# Altium PCB PCI_HIT_carrier.PcbDoc (part 1 of 2)
Units mm, origin at the board's own origin, x right, y up, seen from the top; angles counter-clockwise.
Board outline 51.3 x 50.35 mm, 4 copper layers (Top Layer, HV_vss, vdd_gnd, Bottom Layer); 9 components, 93 nets, 190 pads, 124 vias.
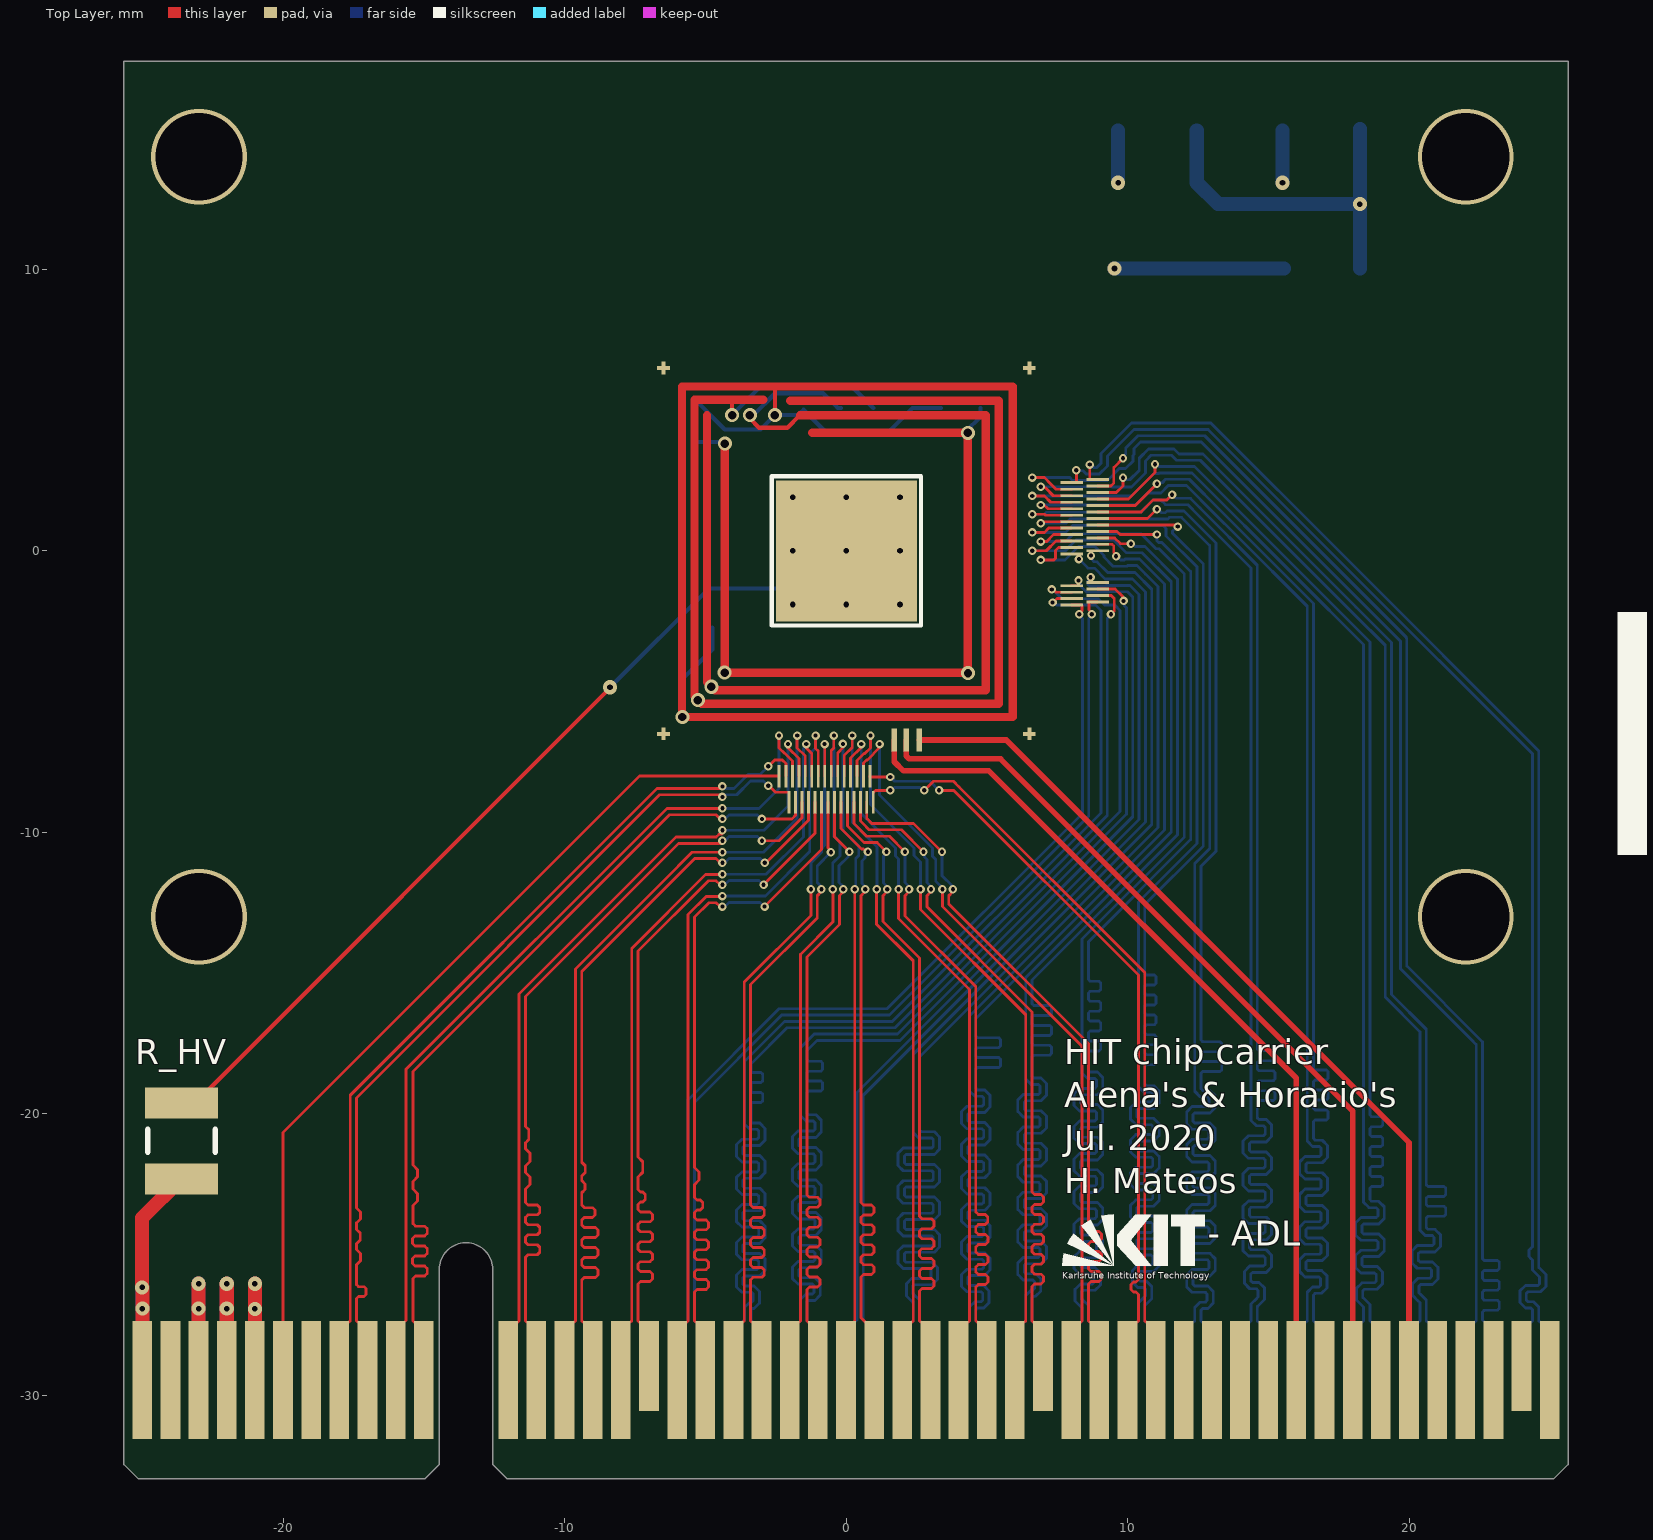
[diagram p0: Top Layer view]
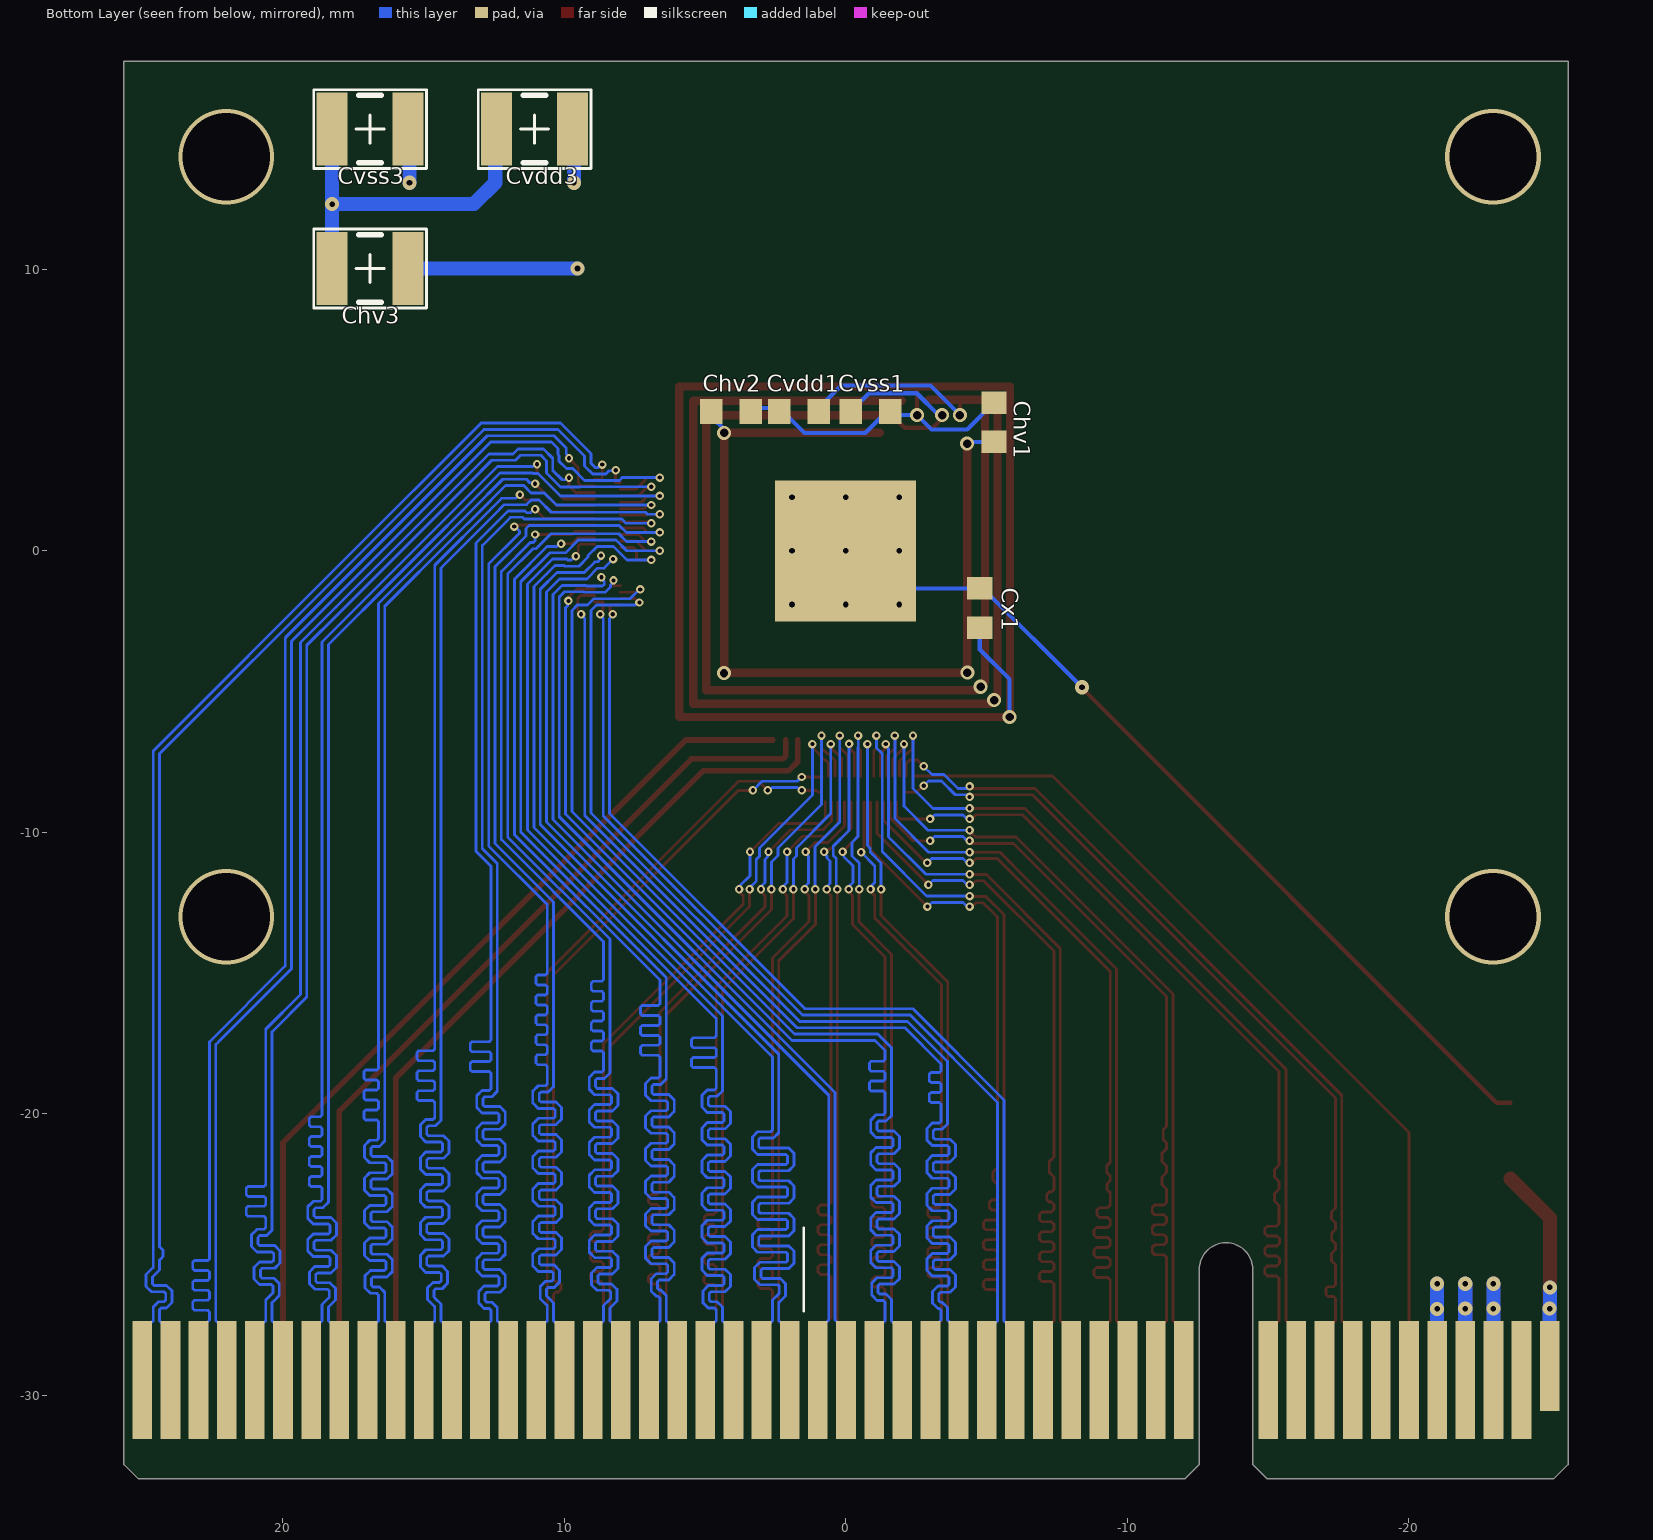
[diagram p1: Bottom Layer view, seen from below]
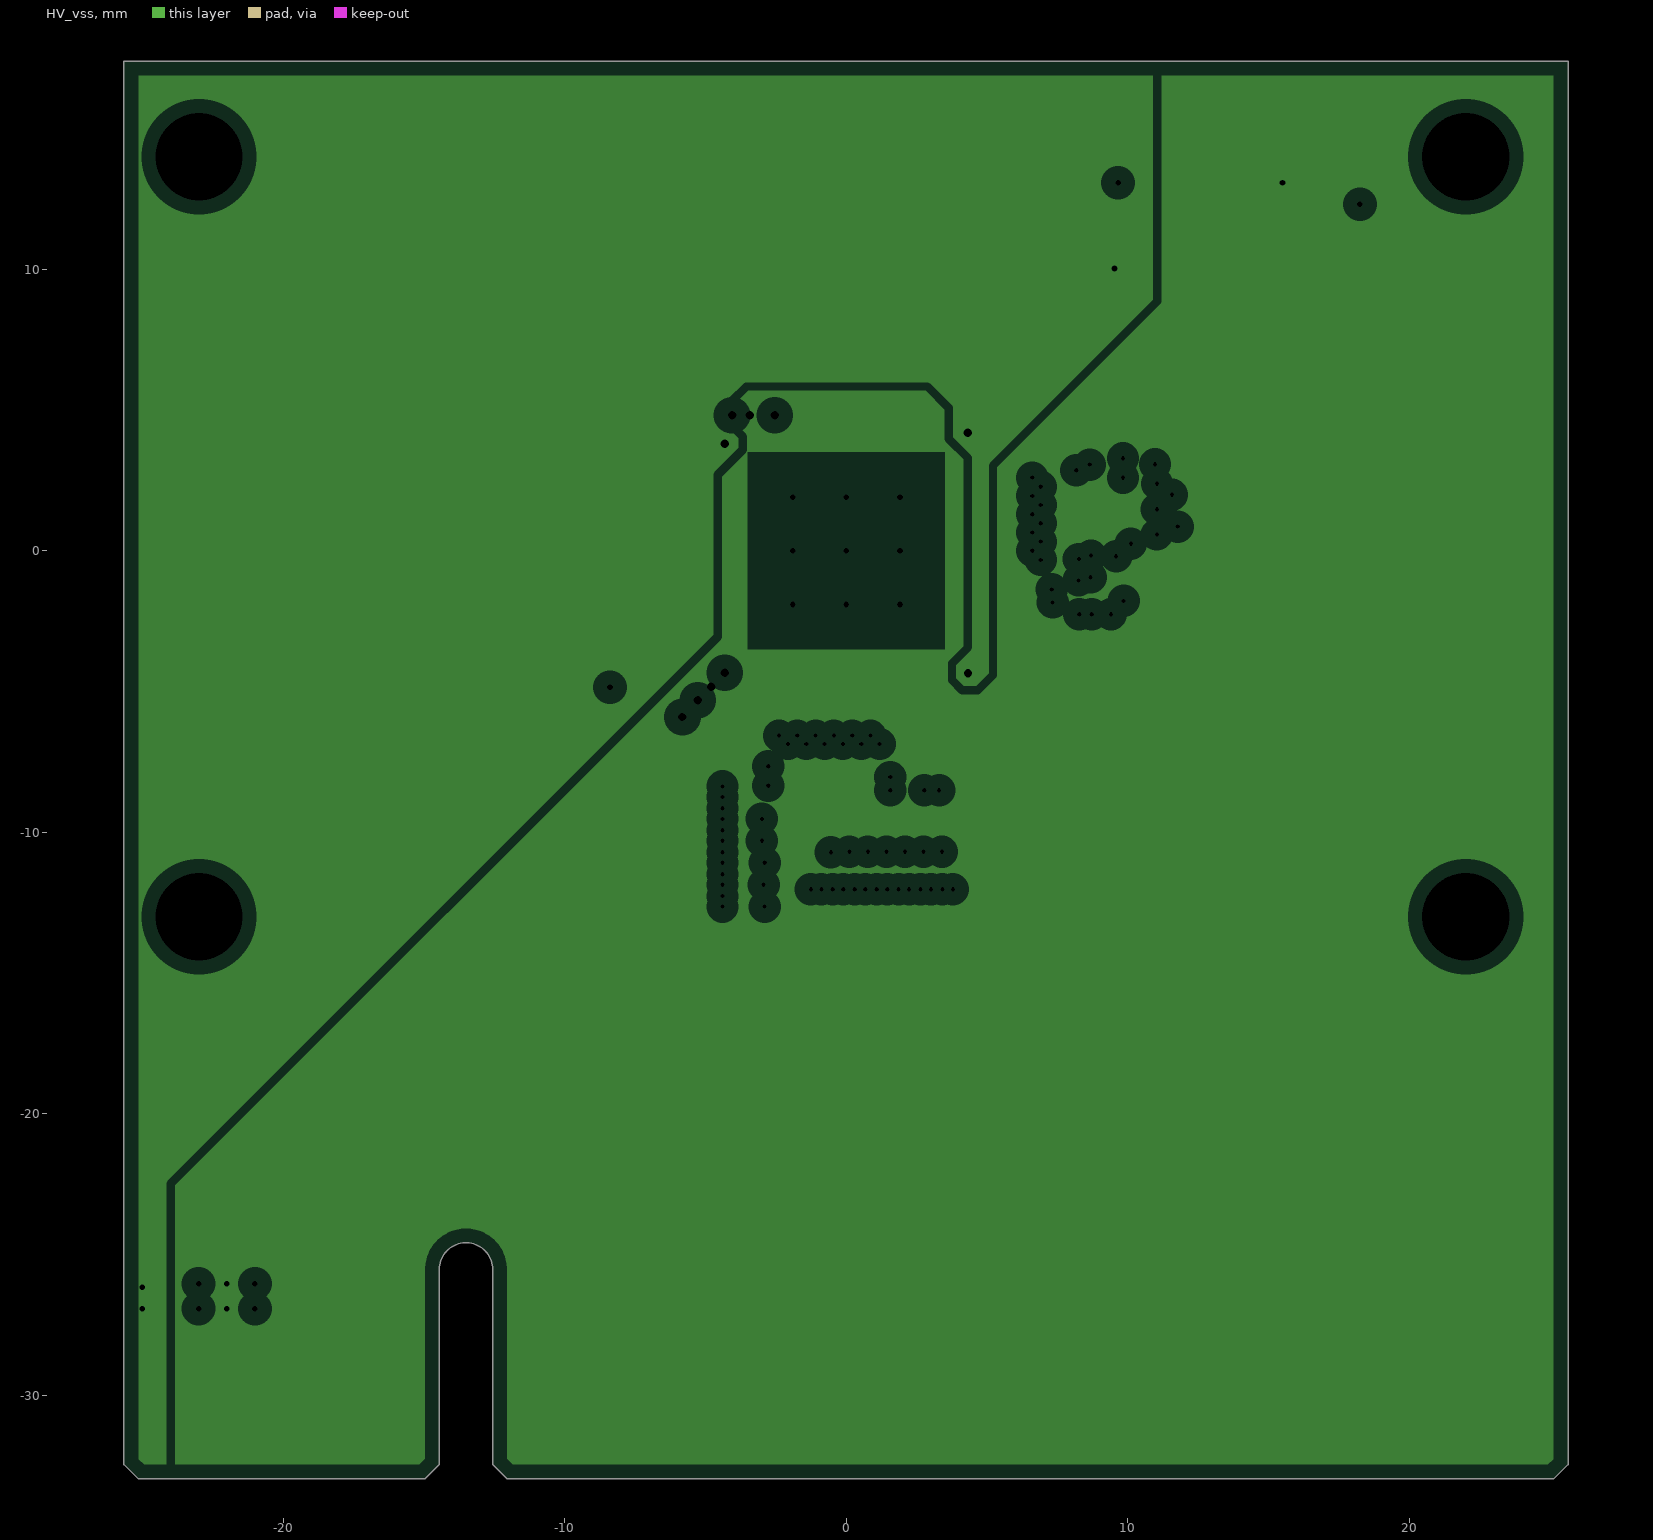
[diagram p2: HV_vss, clearances drawn from the general rule]
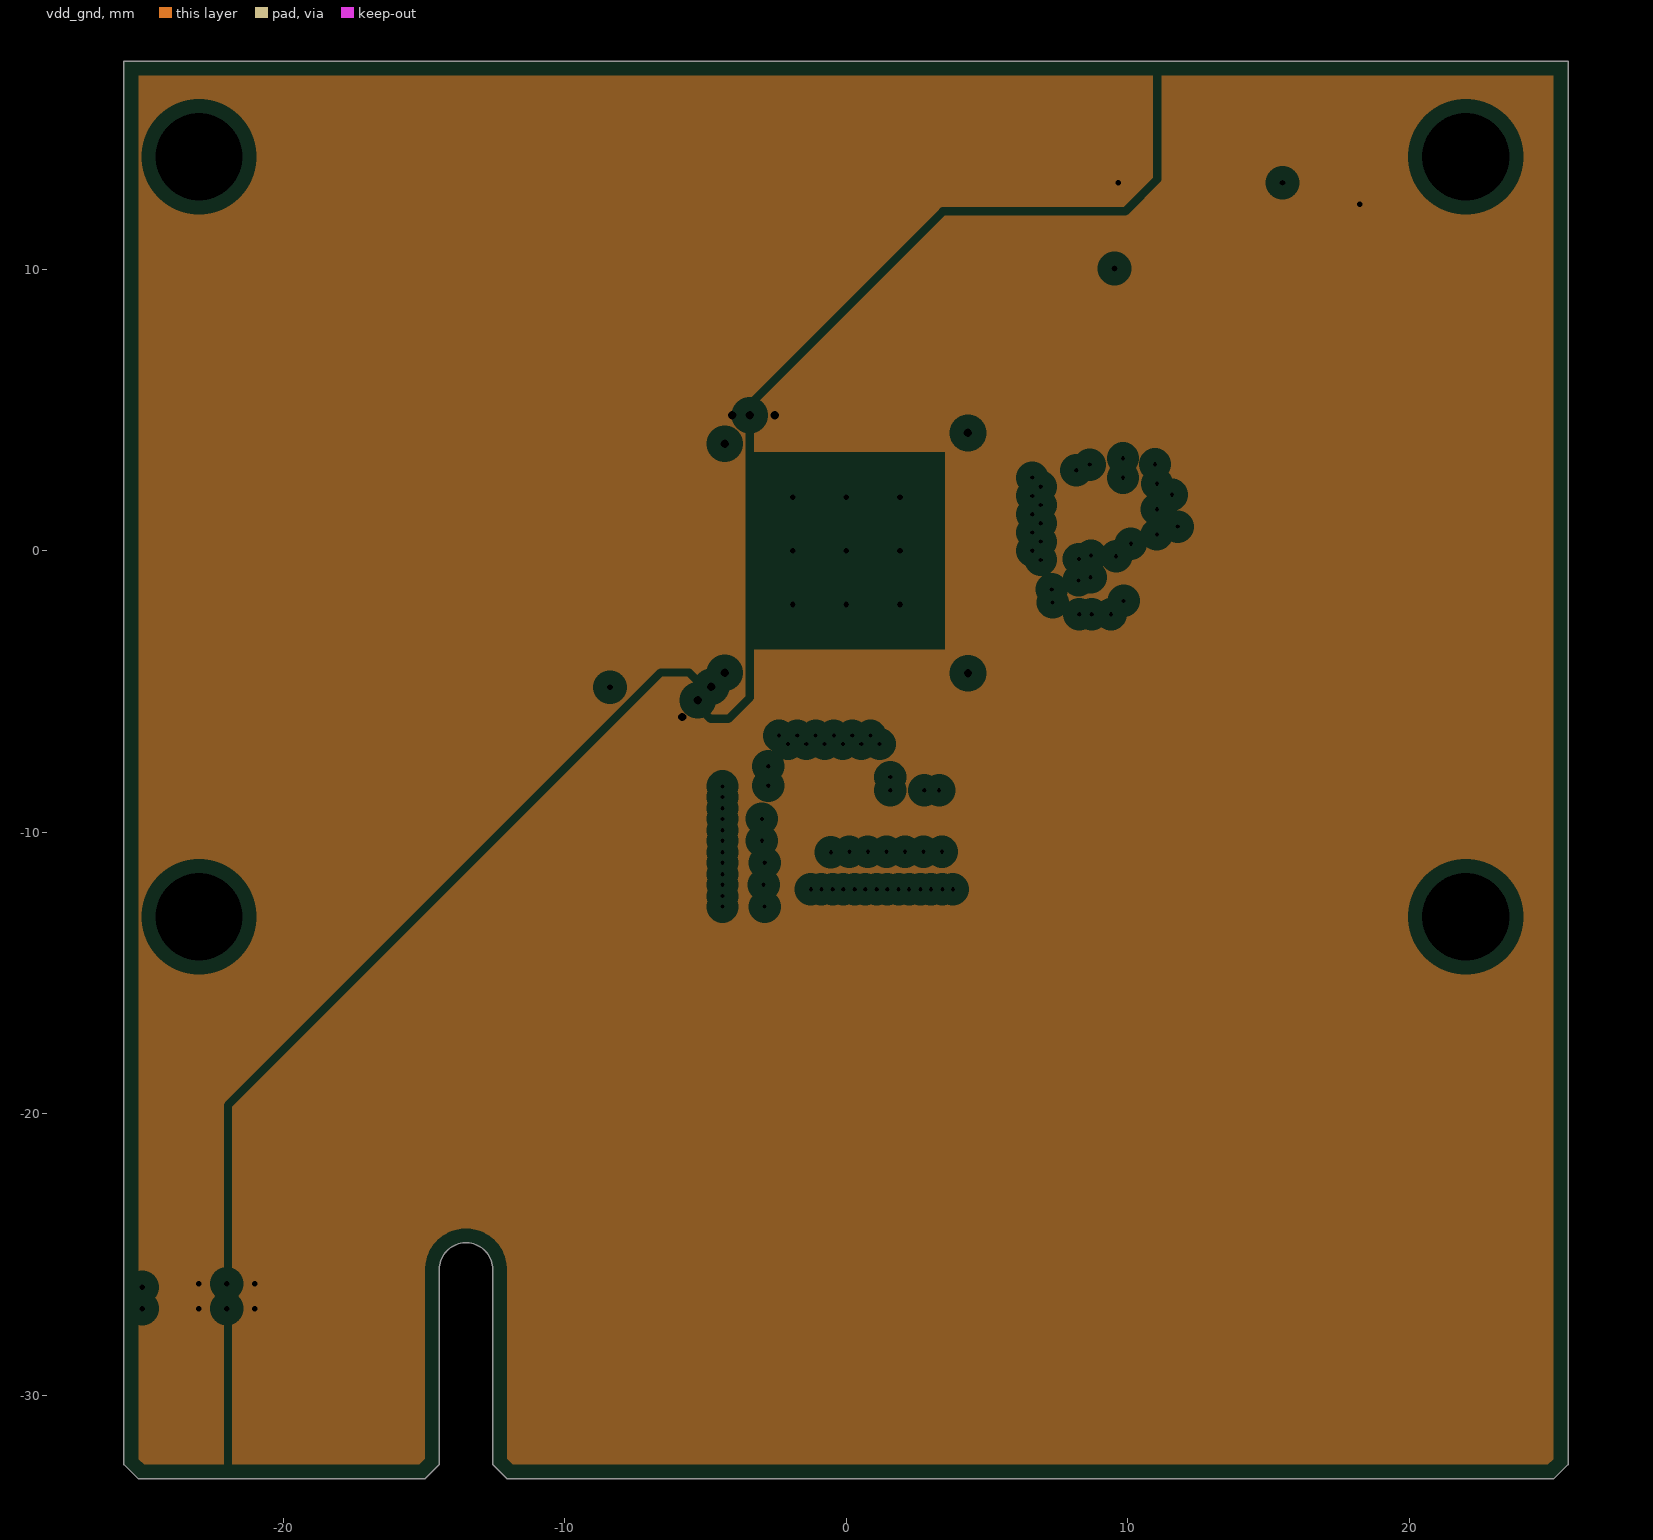
[diagram p3: vdd_gnd, clearances drawn from the general rule]

## Layer stack, top to bottom
Top Solder: solder mask 0.0102, Solder Resist, Dk 3.5
Top Layer: signal copper 0.0356
Dielectric 1: dielectric 0.32, FR-4, Dk 4.8
HV_vss: plane copper 0.0356, net (Multiple Nets)
Dielectric2: dielectric 0.32, FR-4, Dk 4.8
vdd_gnd: plane copper 0.0356, net (Multiple Nets)
Dielectric3: dielectric 0.32, FR-4, Dk 4.8
Bottom Layer: signal copper 0.0356
Bottom Solder: solder mask 0.0102, Solder Resist, Dk 3.5

## Board outline
-25.665,-32.456 -25.165,-32.956 -14.965,-32.956 -14.465,-32.456 -14.465,-25.527 cw(c-13.515,-25.527) -12.565,-25.527 -12.565,-32.456 -12.065,-32.956 25.135,-32.956 25.635,-32.456 25.635,-20.206 25.635,17.399 -25.665,17.399 -25.665,-22.031

## Design rules (kind name [scope] priority, off if disabled: settings)
Clearance [All] p1: gap=0.125 ignorepadtopadclearanceinfootprint=FALSE except(0: Arc-Hole Track-Hole SMDPad-Hole THPad-Hole Via-Hole Fill-Hole Poly-Hole Region-Hole Text-Hole)
ComponentClearance [All] p1: gap=0 collisioncheckmode=3 verticalgap=0 showdistances=FALSE
DiffPairsRouting [InDifferentialPairClass('Horacios')] p1: maxlimit=0.15 minlimit=0.125 mostfreqgap=0.125 toplayer_minwidth=0.1 toplayer_maxwidth=0.15 toplayer_prefwidth=0.1 bottomlayer_minwidth=0.1 bottomlayer_maxwidth=0.15 bottomlayer_prefwidth=0.1 maxuncoupledlength=0.5
FabricationTestPointUsage FabricationTestPointUsage_1 [All] p1: valid=0 allowmultiple=FALSE
FabricationTestpoint FabricationTestpoint_1 [All] p1: side=3 testpointundercomponent=TRUE minsize=1.016 maxsize=2.54 preferedsize=1.524 minholesize=0 maxholesize=1.016 preferedholesize=0.813 testpointgrid=0.025 allowsidetop=TRUE allowsidebottom=TRUE usegrid=TRUE gridtolerance=0
HoleSize [All] p1: absolutevalues=TRUE maxlimit=6 minlimit=0.15 maxpercent=80.000 minpercent=20.000
HoleSize FabricationTestpoint [All] p2 off: absolutevalues=TRUE maxlimit=2.54 minlimit=0.025 maxpercent=80.000 minpercent=20.000
HoleSize FabricationTestPointUsage [All] p3 off: absolutevalues=TRUE maxlimit=2.54 minlimit=0.025 maxpercent=80.000 minpercent=20.000
MatchedLengths MatchedLengths_H_todos [InDifferentialPairClass('Horacios')] p1: tolerance=0.1 checknetsindiffpair=FALSE checkdiffpairvsdiffpair=TRUE checkxsignals=TRUE checkothers=TRUE
MatchedLengths MatchedLengths_A [InDifferentialPairClass('Alena')] p2: tolerance=0.02 checknetsindiffpair=TRUE checkdiffpairvsdiffpair=FALSE checkxsignals=FALSE checkothers=FALSE
MatchedLengths MatchedLengths_H [InDifferentialPairClass('Horacios')] p3: tolerance=0.02 checknetsindiffpair=TRUE checkdiffpairvsdiffpair=FALSE checkxsignals=FALSE checkothers=FALSE
PlaneClearance [All] p1: clearance=0.5
PlaneConnect [All] p1: planeconnectstyle=Relief reliefexpansion=0.4 reliefentries=4 reliefconductorwidth=0.15 reliefairgap=0.15
PolygonConnect [All] p1: connectstyle=Relief reliefconductorwidth=0.15 reliefentries=4 polygonreliefangle="90 Angle" airgapwidth=0.254
RoutingCorners [All] p1: cornerstyle=45-Degree minsetback=1.25 maxsetback=1.25
RoutingVias [All] p1: holewidth=0.15 width=0.3 viastyle="Through Hole" minholewidth=0.15 minwidth=0.3 maxholewidth=0.45 maxwidth=0.75
SilkToSilkClearance [All] p1 off: silktosilkclearance=0.254
SolderMaskExpansion [All] p1: expansion=0.075 istentingtop=FALSE
Width [All] p1: maxlimit=10 minlimit=0.1 preferedwidth=0.1
21 further rules are at their usual default settings.

## Classes and differential pairs
differential pair class Alena: D_A1 D_A2 D_A3 D_A4 D_A5 D_A6 D_A7 D_A8 D_A9 D_A10 D_A11 D_A12 D_A13 D_A14
differential pair class Horacios: D_H1 D_H2 D_H3 D_H4 D_H5 D_H6 D_H7 D_H8 D_H9 D_H10 D_H11 D_H12 D_H13 D_H14 D_H15 D_H16
differential pair D_A7: +A7_P -A7_N
differential pair D_A3: +A3_P -A3_N
differential pair D_A2: +A2_P -A2_N
differential pair D_A10: +A10_P -A10_N
differential pair D_A9: +A9_P -A9_N
differential pair D_A13: +A13_P -A13_N
differential pair D_A8: +A8_P -A8_N
differential pair D_A6: +A6_P -A6_N
differential pair D_A5: +A5_P -A5_N
differential pair D_A4: +A4_P -A4_N
differential pair D_A1: +A1_P -A1_N
differential pair D_A14: +A14_P -A14_N
differential pair D_A12: +A12_P -A12_N
differential pair D_A11: +A11_P -A11_N
differential pair D_H1: +H1_P -H1_N
differential pair D_H6: +H6_P -H6_N
differential pair D_H7: +H7_P -H7_N
differential pair D_H3: +H3_P -H3_N
differential pair D_H4: +H4_P -H4_N
differential pair D_H10: +H10_P -H10_N
differential pair D_H13: +H13_P -H13_N
differential pair D_H14: +H14_P -H14_N
differential pair D_H15: +H15_P -H15_N
differential pair D_H5: +H5_P -H5_N
differential pair D_H2: +H2_P -H2_N
differential pair D_H9: +H9_P -H9_N
differential pair D_H11: +H11_P -H11_N
differential pair D_H8: +H8_P -H8_N
differential pair D_H12: +H12_P -H12_N
differential pair D_H16: +H16_P -H16_N

## Components (designator, comment, footprint, x,y, rotation, side; value= is the part's Value field where it differs from the comment)
Chv1 "Comment" 1608[0603] -5.275,4.572 r90 bottom
Chv2 "Comment" 1608[0603] 4.064,4.953 r0 bottom
Chv3 "Comment" C1210 16.891,10.033 r180 bottom
Cvdd1 "Comment" 1608[0603] 1.651,4.953 r0 bottom
Cvdd3 "Comment" C1210 11.049,14.986 r180 bottom
Cvss1 "Comment" 1608[0603] -0.889,4.953 r180 bottom
Cvss3 "Comment" C1210 16.891,14.986 r180 bottom
Cx1 "Comment" 1608[0603] -4.767,-2.032 r90 bottom
R_HV "Comment" 14-1210 -23.622,-20.955 r270 top

## Footprints (in the part's own frame and the unit in brackets; to place one, negate y for a bottom-side part, rotate by r counter-clockwise, add the part's x,y. Pads: shape width x height; smd on the part's side, far side on the other; paste and mask are expansions set on the pad)
14-1210 [mm] "Chip Resistor, Body 3.2x2.5mm, IPC High Density"
  rect 1.1x2.6 smd: 1(-1.35,0) 2(1.35,0)
  silkscreen extent -0.4,-1.2 0.4,1.2, body extent -1.6,-1.25 1.6,1.25, height 0.6
1608[0603] [mm] "Chip Capacitor, Body 1.6x0.8mm, IPC High Density"
  rect 0.8x0.9 smd: 1(-0.7,0) 2(0.7,0)
C1210 [mm] "Chip Capacitor, Body 3.2x2.5mm, IPC High Density"
  rect 1.1x2.6 smd: 1(-1.35,0) 2(1.35,0)
  silkscreen extent -2,-1.4 2,1.4

## Part data
Chv1 Chv2 Chv3 Cvdd1 Cvdd3 Cvss1 Cvss3: library part "Cap Semi", "Capacitor (Semiconductor SIM Model)"

## Free pads (board coordinates)
  rect 0.7x3.2 smd far side: A1(-25.015,-28.956)
  rect 0.7x4.2 smd far side: A2(-24.015,-29.456) A3(-23.015,-29.456) A4(-22.015,-29.456) A5(-21.015,-29.456) A6(-20.015,-29.456) A7(-19.015,-29.456) A8(-18.015,-29.456) A9(-17.015,-29.456) A10(-16.015,-29.456) A11(-15.015,-29.456) A12(-12.015,-29.456) A13(-11.015,-29.456) A14(-10.015,-29.456) A15(-9.015,-29.456) A16(-8.015,-29.456) A17(-7.015,-29.456) A18(-6.015,-29.456) A19(-5.015,-29.456) A20(-4.015,-29.456) A21(-3.015,-29.456) A22(-2.015,-29.456) A23(-1.015,-29.456) A24(-0.015,-29.456) A25(0.985,-29.456) A26(1.985,-29.456) A27(2.985,-29.456) A28(3.985,-29.456) A29(4.985,-29.456) A30(5.985,-29.456) A31(6.985,-29.456) A32(7.985,-29.456) A33(8.985,-29.456) A34(9.985,-29.456) A35(10.985,-29.456) A36(11.985,-29.456) A37(12.985,-29.456) A38(13.985,-29.456) A39(14.985,-29.456) A40(15.985,-29.456) A41(16.985,-29.456) A42(17.985,-29.456) A43(18.985,-29.456) A44(19.985,-29.456) A45(20.985,-29.456) A46(21.985,-29.456) A47(22.985,-29.456) A48(23.985,-29.456) A49(24.985,-29.456)
  rect 0.7x4.2 smd: B1(-25.015,-29.456) B2(-24.015,-29.456) B3(-23.015,-29.456) B4(-22.015,-29.456) B5(-21.015,-29.456) B6(-20.015,-29.456) B7(-19.015,-29.456) B8(-18.015,-29.456) B9(-17.015,-29.456) B10(-16.015,-29.456) B11(-15.015,-29.456) B12(-12.015,-29.456) B13(-11.015,-29.456) B14(-10.015,-29.456) B15(-9.015,-29.456) B16(-8.015,-29.456) B18(-6.015,-29.456) B19(-5.015,-29.456) B20(-4.015,-29.456) B21(-3.015,-29.456) B22(-2.015,-29.456) B23(-1.015,-29.456) B24(-0.015,-29.456) B25(0.985,-29.456) B26(1.985,-29.456) B27(2.985,-29.456) B28(3.985,-29.456) B29(4.985,-29.456) B30(5.985,-29.456) B32(7.985,-29.456) B33(8.985,-29.456) B34(9.985,-29.456) B35(10.985,-29.456) B36(11.985,-29.456) B37(12.985,-29.456) B38(13.985,-29.456) B39(14.985,-29.456) B40(15.985,-29.456) B41(16.985,-29.456) B42(17.985,-29.456) B43(18.985,-29.456) B44(19.985,-29.456) B45(20.985,-29.456) B46(21.985,-29.456) B47(22.985,-29.456) B49(24.985,-29.456)
  rect 0.1x0.8 smd: B6(-2.4,-8) B8(-2.15,-8) B8(0.15,-8) B9(-2.035,-8.925) B9(0.265,-8.925) B10(-1.92,-8) B10(0.38,-8) B11(-1.805,-8.925) B11(0.495,-8.925) B12(-1.69,-8) B12(0.61,-8) B13(-1.575,-8.925) B13(0.725,-8.925) B13(0.955,-8.925) B14(-1.46,-8) B15(-1.345,-8.925) B15(0.84,-8) B16(-1.23,-8) B17(-1.115,-8.925) B18(-1,-8) B19(-0.885,-8.925) B20(-0.77,-8) B21(-0.655,-8.925) B22(-0.54,-8) B23(-0.425,-8.925) B24(-0.31,-8) B25(-0.195,-8.925) B26(-0.08,-8) B27(0.035,-8.925)
  rect 0.8x0.1 smd: B6(8.925,-1.81) B7(8,-1.695) B7(8,0.35) B7(8,1.04) B7(8,1.73) B7(8,2.427) B7(8.925,0.465) B7(8.925,1.155) B7(8.925,1.845) B8(8.925,-1.58) B9(8,-1.465) B9(8,-0.11) B10(8.925,-1.35) B10(8.925,0.005) B11(8,-1.235) B11(8,0.58) B11(8,1.27) B11(8,1.96) B11(8.925,0.695) B11(8.925,1.385) B11(8.925,2.075) B12(8.925,-1.12) B15(8,-1.925) B15(8,0.12) B15(8,0.81) B15(8,1.5) B15(8,2.19) B15(8.925,0.235) B15(8.925,0.925) B15(8.925,1.615) B15(8.925,2.305) B15(8.925,2.535)
  rect 0.2x0.8 smd: B13(1.7,-6.717) B13(2.125,-6.717) B13(2.585,-6.717)
  rect 0.7x3.2 smd: B17(-7.015,-28.956) B31(6.985,-28.956) B48(23.985,-28.956)
  rect 0.15x0.45 smd: p(-6.5,-6.5) p(-6.5,6.5) p(6.5,-6.5) p(6.5,6.5)
  rect 0.45x0.15 smd: p(-6.5,-6.5) p(-6.5,6.5) p(6.5,-6.5) p(6.5,6.5)
  rect 5x5 smd far side mask-2.51: X(0,0)
  rect 5x5 smd: X(0,0)

## Via types
v1: diameter 0.3, hole 0.15, Top Layer to Bottom Layer, 88 vias
v2: diameter 0.5, hole 0.2, Top Layer to Bottom Layer, 22 vias
v3: diameter 0.5, hole 0.3, Top Layer to Bottom Layer, 10 vias
v4: diameter 3.4, hole 3.1, Top Layer to Bottom Layer, 4 vias

## Nets (pads, with @x,y where several pads share a name; then routed paths per layer and width w, separated by ;. In a path a pad name is that pad's centre, name@x,y a point inside that pad or via, vN(x,y) a via of type N, cw(c..) or ccw(c..) an arc to the next point about the centre after c; other vN are vias at no path point)
A1_N: pad.B8@-2.15,-8 pad.B8@-18.015,-29.456 | length 31.3
  Top Layer w0.1: pad.B8@-18.015,-29.456 -18.015,-27.706 -17.715,-27.406 -17.686,-27.406 -17.628,-27.347 -17.628,-19.339 -6.728,-8.439 -6.618,-8.439 -4.477,-8.439 v1(-4.404,-8.366) ; v1(-2.773,-7.652) -2.546,-7.425 -2.278,-7.425 -2.15,-7.553 pad.B8@-2.15,-8
  Bottom Layer w0.1: v1(-4.404,-8.366) -4.335,-8.436 -3.99,-8.436 -3.501,-7.947 -3.069,-7.947 v1(-2.773,-7.652)
A1_P: pad.B9@-2.035,-8.925 pad.B9@-17.015,-29.456 | length 31.2
  Top Layer w0.1: pad.B9@-17.015,-29.456 -17.015,-27.706 -17.315,-27.406 -17.344,-27.406 -17.403,-27.347 -17.403,-26.967 -17.403,-26.563 -17.332,-26.492 -17.141,-26.492 -17.07,-26.421 -17.07,-26.209 -17.141,-26.138 -17.332,-26.138 -17.403,-26.067 -17.403,-25.599 -17.403,-25.358 -17.263,-25.219 -17.263,-24.959 -17.403,-24.82 -17.403,-24.613 -17.271,-24.482 -17.271,-24.236 -17.403,-24.105 -17.403,-23.87 -17.263,-23.731 -17.263,-23.48 -17.403,-23.34 -17.403,-19.432 -6.634,-8.664 -4.481,-8.664 v1(-4.404,-8.74) ; v1(-2.773,-8.342) -2.755,-8.342 -2.522,-8.575 -2.089,-8.575
  Bottom Layer w0.1: v1(-4.404,-8.74) -4.325,-8.661 -3.896,-8.661 -3.408,-8.172 -2.944,-8.172 v1(-2.773,-8.342)
A2_N: pad.B10@-1.92,-8 pad.B10@-16.015,-29.456 | length 32.1
  Top Layer w0.1: pad.B10@-16.015,-29.456 -16.015,-27.706 -15.645,-27.336 -15.645,-18.413 -6.377,-9.145 v1(-4.404,-9.145) ; v1(-2.395,-6.561) -2.401,-6.567 -2.401,-6.995 -2.21,-7.185 -2.199,-7.185 -1.92,-7.464 pad.B10@-1.92,-8
  Bottom Layer w0.1: v1(-4.404,-9.145) -3.108,-9.145 -2.401,-8.438 -2.401,-6.567 v1(-2.395,-6.561)
A2_P: pad.B11@-1.805,-8.925 pad.B11@-15.015,-29.456 | length 32.1
  Top Layer w0.1: -15.403,-23.253 -15.403,-23.49 ; pad.B11@-15.015,-29.456 -15.015,-27.706 -15.315,-27.406 -15.344,-27.406 -15.403,-27.347 -15.403,-26.251 -15.403,-25.847 -15.314,-25.758 -14.983,-25.758 -14.895,-25.67 -14.895,-25.493 -14.983,-25.404 -15.332,-25.404 -15.42,-25.316 -15.42,-25.139 -15.332,-25.05 -14.983,-25.05 -14.895,-24.962 -14.895,-24.785 -14.983,-24.696 -15.332,-24.696 -15.42,-24.608 -15.42,-24.431 -15.332,-24.342 -14.983,-24.342 -14.895,-24.254 -14.895,-24.077 -14.983,-23.988 -15.314,-23.988 -15.403,-23.9 -15.403,-23.49 ; v1@-4.529,-9.481 -4.639,-9.37 -6.284,-9.37 -15.403,-18.489 -15.403,-21.817 -15.235,-21.984 -15.235,-22.233 -15.403,-22.401 -15.403,-22.667 -15.235,-22.834 -15.235,-23.089 -15.403,-23.256 -15.403,-23.49 ; v1(-3.004,-9.519) -1.932,-9.519 -1.805,-9.392 pad.B11@-1.805,-8.925
  Bottom Layer w0.1: v1(-4.404,-9.519) -4.366,-9.481 -4.28,-9.481 -4.176,-9.376 -3.163,-9.376 -3.02,-9.519 v1(-3.004,-9.519)
A3_N: pad.B12@-1.69,-8 pad.B12@-12.015,-29.456 | length 29.7
  Top Layer w0.1: pad.B12@-12.015,-29.456 -12.015,-27.706 -11.715,-27.406 -11.686,-27.406 -11.628,-27.347 -11.628,-19.639 -11.628,-15.737 -6.058,-10.167 -4.627,-10.167 -4.528,-10.068 -4.443,-10.068 v1@-4.404,-10.03 ; v1(-2.076,-6.86) -2.076,-6.99 -1.69,-7.376 pad.B12@-1.69,-8
  Bottom Layer w0.1: v1(-4.404,-9.924) -2.932,-9.924 -2.076,-9.068 v1(-2.076,-6.86)
A3_P: pad.B13@-1.575,-8.925 pad.B13@-11.015,-29.456 | length 29.7
  Top Layer w0.1: pad.B13@-11.015,-29.456 -11.015,-27.706 -11.315,-27.406 -11.344,-27.406 -11.403,-27.347 -11.403,-25.494 -11.403,-25.09 -11.314,-25.002 -10.983,-25.002 -10.895,-24.913 -10.895,-24.736 -10.983,-24.648 -11.314,-24.648 -11.403,-24.559 -11.403,-24.382 -11.314,-24.294 -10.983,-24.294 -10.895,-24.205 -10.895,-24.028 -10.983,-23.94 -11.314,-23.94 -11.403,-23.851 -11.403,-23.674 -11.314,-23.586 -10.983,-23.586 -10.895,-23.497 -10.895,-23.32 -10.983,-23.232 -11.314,-23.232 -11.403,-23.143 -11.403,-22.988 -11.403,-22.669 -11.24,-22.507 -11.24,-22.238 -11.403,-22.076 -11.403,-21.849 -11.24,-21.686 -11.24,-21.4 -11.403,-21.237 -11.403,-21.028 -11.285,-20.91 -11.285,-20.56 -11.403,-20.443 -11.403,-15.83 -5.965,-10.392 v1@-4.416,-10.392 ; v1(-3.004,-10.298) -2.392,-10.298 -1.575,-9.481 pad.B13@-1.575,-8.925
  Bottom Layer w0.1: v1(-4.404,-10.298) -4.366,-10.26 -4.281,-10.26 -4.17,-10.149 -3.163,-10.149 -3.014,-10.298 v1(-3.004,-10.298)
A4_N: pad.B14 | length 29.5
  Top Layer w0.1: pad.B14@-10.015,-29.456 -10.015,-27.706 -9.715,-27.406 -9.686,-27.406 -9.628,-27.347 -9.628,-19.639 -9.628,-14.848 -5.916,-11.137 ; -5.974,-11.194 -5.483,-10.703 v1(-4.404,-10.703) ; v1(-1.745,-6.561) -1.751,-6.567 -1.751,-6.997 -1.46,-7.288 pad.B14@-1.46,-8
  Bottom Layer w0.1: v1(-4.404,-10.703) -2.946,-10.703 -1.751,-9.508 -1.751,-6.567 v1(-1.745,-6.561)
A4_P: pad.B15@-1.345,-8.925 pad.B15@-9.015,-29.456 | length 29.5
  Top Layer w0.1: pad.B15@-9.015,-29.456 -9.015,-27.706 -9.315,-27.406 -9.344,-27.406 -9.403,-27.347 -9.403,-26.302 -9.403,-25.898 -9.314,-25.809 -8.918,-25.809 -8.83,-25.721 -8.83,-25.544 -8.918,-25.455 -9.314,-25.455 -9.403,-25.367 -9.403,-25.19 -9.314,-25.101 -8.918,-25.101 -8.83,-25.013 -8.83,-24.836 -8.918,-24.747 -9.314,-24.747 -9.403,-24.659 -9.403,-24.482 -9.314,-24.393 -8.918,-24.393 -8.83,-24.305 -8.83,-24.128 -8.918,-24.039 -9.314,-24.039 -9.403,-23.951 -9.403,-23.774 -9.314,-23.685 -9.026,-23.685 -8.937,-23.597 -8.937,-23.42 -9.026,-23.331 -9.314,-23.331 -9.403,-23.243 -9.403,-23.123 -9.403,-22.8 -9.286,-22.683 -9.286,-22.486 -9.403,-22.369 -9.403,-22.211 -9.28,-22.088 -9.28,-21.84 -9.403,-21.717 -9.403,-14.941 -5.823,-11.362 ; -5.815,-11.353 -5.39,-10.928 -4.639,-10.928 v1@-4.528,-11.039 ; v1(-2.904,-11.078) -2.853,-11.078 -1.345,-9.57 pad.B15@-1.345,-8.925
  Bottom Layer w0.1: v1(-4.404,-11.078) -4.366,-11.039 -4.281,-11.039 -4.17,-10.928 -3.062,-10.928 -2.913,-11.078 v1(-2.904,-11.078)
A5_N: pad.B16 | length 27.8
  Top Layer w0.1: pad.B16@-8.015,-29.456 -8.015,-27.706 -7.715,-27.406 -7.686,-27.406 -7.628,-27.347 -7.628,-14.122 -5.001,-11.495 -4.416,-11.495 v1(-4.404,-11.483) ; v1(-1.426,-6.86) -1.426,-7.004 -1.23,-7.2 pad.B16@-1.23,-8
  Bottom Layer w0.1: v1(-4.404,-11.483) -2.846,-11.483 -1.526,-10.163 -1.526,-7.014 -1.426,-6.914 v1(-1.426,-6.86)
A5_P: pad.B17 | length 27.8
  Top Layer w0.1: pad.B17@-7.015,-28.956 -7.015,-27.706 -7.315,-27.406 -7.344,-27.406 -7.403,-27.347 -7.403,-26.451 -7.403,-26.047 -7.314,-25.958 -6.983,-25.958 -6.895,-25.87 -6.895,-25.693 -6.983,-25.604 -7.314,-25.604 -7.403,-25.516 -7.403,-25.339 -7.314,-25.25 -6.983,-25.25 -6.895,-25.162 -6.895,-24.985 -6.983,-24.896 -7.314,-24.896 -7.403,-24.808 -7.403,-24.631 -7.314,-24.542 -6.983,-24.542 -6.895,-24.454 -6.895,-24.277 -6.983,-24.188 -7.314,-24.188 -7.403,-24.1 -7.403,-23.923 -7.314,-23.834 -6.983,-23.834 -6.895,-23.746 -6.895,-23.569 -6.983,-23.48 -7.314,-23.48 -7.403,-23.392 -7.403,-23.215 -7.314,-23.126 -7.236,-23.126 -7.147,-23.038 -7.147,-22.861 -7.236,-22.772 -7.314,-22.772 -7.403,-22.684 -7.403,-22.524 -7.403,-22.243 -7.233,-22.074 -7.233,-21.699 -7.403,-21.53 -7.403,-14.215 -4.908,-11.72 -4.627,-11.72 v1@-4.529,-11.819 ; v1(-2.942,-11.857) -1.115,-10.03 pad.B17@-1.115,-8.925
  Bottom Layer w0.1: v1(-4.404,-11.857) -4.366,-11.819 -4.28,-11.819 -4.17,-11.708 -3.101,-11.708 -2.952,-11.857 v1(-2.942,-11.857)
A6_N: pad.B18 | length 27.7
  Top Layer w0.1: pad.B18@-6.015,-29.456 -6.015,-27.706 -5.715,-27.406 -5.686,-27.406 -5.628,-27.347 -5.628,-19.639 -5.628,-13.505 -5.628,-12.919 -4.982,-12.273 -4.416,-12.273 v1(-4.404,-12.262) ; v1(-1.095,-6.561) -1.101,-6.567 -1.101,-6.995 -1.095,-7 -1.095,-7.017 -1,-7.112 pad.B18@-1,-8
  Bottom Layer w0.1: v1(-4.404,-12.262) -2.881,-12.262 -1.301,-10.682 -1.301,-7.195 -1.101,-6.995 -1.101,-6.567 v1(-1.095,-6.561)
A6_P: pad.B19 | length 27.7
  Top Layer w0.1: pad.B19@-5.015,-29.456 -5.015,-27.706 -5.315,-27.406 -5.344,-27.406 -5.403,-27.347 -5.403,-26.735 -5.403,-26.331 -5.314,-26.242 -4.983,-26.242 -4.895,-26.154 -4.895,-25.977 -4.983,-25.888 -5.314,-25.888 -5.403,-25.8 -5.403,-25.623 -5.314,-25.534 -4.983,-25.534 -4.895,-25.446 -4.895,-25.269 -4.983,-25.18 -5.314,-25.18 -5.403,-25.092 -5.403,-24.915 -5.314,-24.826 -4.983,-24.826 -4.895,-24.738 -4.895,-24.561 -4.983,-24.472 -5.314,-24.472 -5.403,-24.384 -5.403,-24.207 -5.314,-24.118 -4.983,-24.118 -4.895,-24.03 -4.895,-23.853 -4.983,-23.764 -5.314,-23.764 -5.403,-23.676 -5.403,-23.499 -5.314,-23.41 -5.194,-23.41 -5.106,-23.322 -5.106,-23.145 -5.194,-23.056 -5.314,-23.056 -5.403,-22.968 -5.403,-22.833 -5.403,-22.515 -5.242,-22.354 -5.242,-22.063 -5.401,-21.904 -5.401,-13.011 -4.888,-12.498 -4.628,-12.498 v1@-4.53,-12.596 ; v1(-2.908,-12.634) -0.885,-10.612 pad.B19@-0.885,-8.925
  Bottom Layer w0.1: v1(-4.404,-12.634) -4.366,-12.596 -4.279,-12.596 -4.17,-12.487 -3.066,-12.487 -2.919,-12.634 v1(-2.908,-12.634)
A7_N: pad.B20 | length 25.1
  Top Layer w0.1: pad.B20@-4.015,-29.456 -4.015,-27.706 -3.715,-27.406 -3.686,-27.406 -3.628,-27.347 -3.628,-15.314 -1.263,-12.95 v1(-1.263,-12.016) ; v1(-0.776,-6.86) -0.77,-6.86 pad.B20@-0.77,-8
  Bottom Layer w0.1: v1(-1.263,-12.016) -1.263,-11.082 -0.877,-10.696 -0.877,-10.566 -0.776,-10.465 v1(-0.776,-6.86)
A7_P: pad.B21 | length 25.1
  Top Layer w0.1: pad.B21@-3.015,-29.456 -3.015,-27.706 -3.315,-27.406 -3.344,-27.406 -3.403,-27.347 -3.403,-26.299 -3.403,-25.895 -3.314,-25.806 -3.006,-25.806 -2.918,-25.718 -2.918,-25.541 -3.006,-25.452 -3.314,-25.452 -3.403,-25.364 -3.403,-25.187 -3.314,-25.098 -3.006,-25.098 -2.918,-25.01 -2.918,-24.833 -3.006,-24.744 -3.314,-24.744 -3.403,-24.656 -3.403,-24.479 -3.314,-24.39 -3.006,-24.39 -2.918,-24.302 -2.918,-24.125 -3.006,-24.036 -3.314,-24.036 -3.403,-23.948 -3.403,-23.771 -3.314,-23.682 -3.006,-23.682 -2.918,-23.594 -2.918,-23.417 -3.006,-23.328 -3.314,-23.328 -3.403,-23.24 -3.403,-23.098 -3.403,-15.407 -1.038,-13.043 -1.038,-12.25 -0.927,-12.139 -0.927,-12.054 v1(-0.889,-12.016) ; pad.B21@-0.655,-8.925 -0.655,-10.543 -0.552,-10.647 v1(-0.552,-10.701)
  Bottom Layer w0.1: v1(-0.889,-12.016) -0.927,-11.977 -0.927,-11.892 -1.038,-11.781 -1.038,-11.187 v1(-0.552,-10.701)
A8_N: pad.B22 | length 25.2
  Top Layer w0.1: pad.B22@-2.015,-29.456 -2.015,-27.706 -1.715,-27.406 -1.686,-27.406 -1.628,-27.347 -1.628,-14.331 -0.472,-13.176 -0.472,-12.027 v1(-0.484,-12.016) ; pad.B22@-0.54,-8 -0.54,-7.09 -0.451,-7 -0.451,-6.567 v1(-0.445,-6.561)
  Bottom Layer w0.1: v1(-0.484,-12.016) -0.484,-11.093 -0.224,-10.833 -0.224,-10.355 -0.445,-10.134 -0.445,-6.995 -0.451,-6.989 -0.451,-6.567 v1(-0.445,-6.561)
A8_P: pad.B23 | length 25.2
  Top Layer w0.1: pad.B23@-1.015,-29.456 -1.015,-27.706 -1.315,-27.406 -1.344,-27.406 -1.403,-27.347 -1.403,-26.642 -1.403,-26.238 -1.314,-26.15 -1.032,-26.15 -0.944,-26.061 -0.944,-25.884 -1.032,-25.796 -1.314,-25.796 -1.403,-25.707 -1.403,-25.53 -1.314,-25.442 -1.032,-25.442 -0.944,-25.353 -0.944,-25.176 -1.032,-25.088 -1.314,-25.088 -1.403,-24.999 -1.403,-24.822 -1.314,-24.734 -1.032,-24.734 -0.944,-24.645 -0.944,-24.468 -1.032,-24.38 -1.314,-24.38 -1.403,-24.291 -1.403,-24.114 -1.314,-24.026 -1.032,-24.026 -0.944,-23.937 -0.944,-23.76 -1.032,-23.672 -1.314,-23.672 -1.403,-23.583 -1.403,-23.406 -1.314,-23.318 -1.032,-23.318 -0.944,-23.229 -0.944,-23.052 -1.032,-22.964 -1.314,-22.964 -1.403,-22.875 -1.403,-22.593 -1.403,-14.424 -0.247,-13.269 -0.247,-12.238 -0.149,-12.14 -0.149,-12.054 v1(-0.11,-12.016) ; pad.B23@-0.425,-8.925 -0.425,-10.154 v1@0.106,-10.685
  Bottom Layer w0.1: v1(-0.11,-12.016) -0.149,-11.977 -0.149,-11.891 -0.259,-11.781 -0.259,-11.186 0.068,-10.859 0.068,-10.729 v1(0.106,-10.69)
A9_N: pad.B24 | length 24.3
  Top Layer w0.1: pad.B24@-0.31,-8 -0.31,-7.178 -0.12,-6.988 -0.126,-6.982 v1(-0.126,-6.854) ; pad.B24@-0.015,-29.456 0.285,-29.156 0.285,-27.357 0.295,-27.347 v1(0.295,-12.016)
  Bottom Layer w0.1: v1(-0.126,-6.854) -0.126,-9.929 0.438,-10.493 0.438,-10.818 0.333,-10.923 0.333,-11.977 v1(0.295,-12.016)
A9_P: pad.B25 | length 24.3
  Top Layer w0.1: pad.B25@-0.195,-8.925 -0.195,-9.86 0.53,-10.585 0.605,-10.585 0.71,-10.69 v1(0.764,-10.69) ; v1(0.669,-12.016) 0.63,-12.054 0.63,-12.139 0.52,-12.25 0.52,-22.471 0.52,-23.144 0.608,-23.232 0.894,-23.232 0.983,-23.321 0.983,-23.498 0.894,-23.586 0.608,-23.586 0.52,-23.675 0.52,-23.852 0.608,-23.94 0.894,-23.94 0.983,-24.029 0.983,-24.206 0.894,-24.294 0.608,-24.294 0.52,-24.383 0.52,-24.56 0.608,-24.648 0.894,-24.648 0.983,-24.737 0.983,-24.914 0.894,-25.002 0.608,-25.002 0.52,-25.091 0.52,-25.268 0.608,-25.356 0.894,-25.356 0.983,-25.445 0.983,-25.622 0.894,-25.71 0.608,-25.71 0.52,-25.799 0.52,-26.203 0.52,-27.241 0.985,-27.706 pad.B25@0.985,-29.456
  Bottom Layer w0.1: v1(0.669,-12.016) 0.63,-11.977 0.63,-11.892 0.558,-11.819 0.558,-11.017 0.663,-10.911 0.663,-10.845 0.764,-10.745 v1(0.764,-10.69)
A10_N: pad.B26 | length 25.5
  Top Layer w0.1: pad.B26@-0.08,-8 -0.08,-7.268 0.205,-6.983 v1(0.205,-6.561) ; v1(1.074,-12.016) 1.074,-13.261 2.372,-14.559 2.372,-27.347 2.314,-27.406 2.285,-27.406 1.985,-27.706 pad.B26@1.985,-29.456
  Bottom Layer w0.1: v1(0.205,-6.561) 0.205,-9.624 1.089,-10.508 1.089,-12.001 v1(1.074,-12.016)
A10_P: pad.B27 | length 25.6
  Top Layer w0.1: pad.B27@0.035,-8.925 0.035,-9.772 0.624,-10.36 1.092,-10.36 v1(1.422,-10.69) ; v1(1.449,-12.016) 1.41,-12.054 1.41,-12.139 1.299,-12.25 1.299,-13.168 2.597,-14.466 2.597,-21.987 2.597,-23.637 2.686,-23.726 3.025,-23.726 3.114,-23.814 3.114,-23.991 3.025,-24.08 2.686,-24.08 2.597,-24.168 2.597,-24.345 2.686,-24.434 3.027,-24.434 3.116,-24.522 3.116,-24.699 3.027,-24.788 2.686,-24.788 2.597,-24.876 2.597,-25.053 2.686,-25.142 3.027,-25.142 3.116,-25.23 3.116,-25.407 3.027,-25.496 2.686,-25.496 2.597,-25.584 2.597,-25.761 2.686,-25.85 3.027,-25.85 3.116,-25.938 3.116,-26.115 3.027,-26.204 2.686,-26.204 2.597,-26.292 2.597,-26.696 2.597,-27.347 2.656,-27.406 2.685,-27.406 2.985,-27.706 pad.B27@2.985,-29.456
  Bottom Layer w0.1: v1(1.422,-10.69) 1.422,-10.741 1.314,-10.849 1.314,-11.796 1.41,-11.892 1.41,-11.977 v1(1.449,-12.016)
A11_N: pad.B8@0.15,-8 pad.B28 | length 25.7
  Top Layer w0.1: pad.B8@0.15,-8 0.15,-7.356 0.53,-6.976 v1(0.53,-6.86) ; v1(1.854,-12.016) 1.854,-13.059 4.372,-15.578 4.372,-27.347 4.314,-27.406 4.285,-27.406 3.985,-27.706 pad.B28@3.985,-29.456
  Bottom Layer w0.1: v1(0.53,-6.86) 0.53,-9.339 1.747,-10.556 1.747,-10.836 1.854,-10.943 v1(1.854,-12.016)
A11_P: pad.B9@0.265,-8.925 pad.B29 | length 25.7
  Top Layer w0.1: pad.B9@0.265,-8.925 0.265,-9.684 0.717,-10.135 1.525,-10.135 v1(2.08,-10.69) ; v1(2.228,-12.016) 2.189,-12.054 2.189,-12.14 2.079,-12.25 2.079,-12.966 4.597,-15.484 4.597,-23.254 4.597,-23.49 4.686,-23.578 4.932,-23.578 5.021,-23.667 5.021,-23.844 4.932,-23.932 4.686,-23.932 4.597,-24.021 4.597,-24.198 4.686,-24.286 4.937,-24.286 5.025,-24.375 5.025,-24.552 4.937,-24.64 4.686,-24.64 4.597,-24.729 4.597,-24.906 4.686,-24.994 4.937,-24.994 5.025,-25.082 5.025,-25.26 4.937,-25.348 4.686,-25.348 4.597,-25.436 4.597,-25.614 4.686,-25.702 4.937,-25.702 5.025,-25.79 5.025,-25.968 4.937,-26.056 4.686,-26.056 4.597,-26.144 4.597,-26.549 4.597,-27.347 4.656,-27.406 4.685,-27.406 4.985,-27.706 pad.B29@4.985,-29.456
  Bottom Layer w0.1: v1(2.08,-10.69) 2.08,-11.782 2.189,-11.891 2.189,-11.977 v1(2.228,-12.016)
A12_N: pad.B10@0.38,-8 pad.B30 | length 27
  Top Layer w0.1: pad.B10@0.38,-8 0.38,-7.444 0.624,-7.2 0.65,-7.2 0.855,-6.995 v1(0.855,-6.561) ; v1(2.633,-12.016) 2.633,-12.736 6.372,-16.476 6.372,-27.347 6.314,-27.406 6.285,-27.406 5.985,-27.706 pad.B30@5.985,-29.456
  Bottom Layer w0.1: v1(0.855,-6.561) 0.855,-9.006 2.405,-10.556 2.405,-10.825 2.633,-11.053 v1(2.633,-12.016)
A12_P: pad.B11@0.495,-8.925 pad.B31 | length 27
  Top Layer w0.1: pad.B11@0.495,-8.925 0.495,-9.595 0.585,-9.685 0.806,-9.907 1.954,-9.907 v1(2.738,-10.69) ; v1(3.005,-12.016) 2.967,-12.054 2.967,-12.141 2.858,-12.25 2.858,-12.643 6.598,-16.383 6.598,-22.405 6.598,-22.773 6.686,-22.861 6.911,-22.861 6.999,-22.95 6.999,-23.127 6.911,-23.215 6.686,-23.215 6.598,-23.304 6.598,-23.481 6.686,-23.569 6.911,-23.569 6.999,-23.658 6.999,-23.835 6.911,-23.923 6.686,-23.923 6.598,-24.012 6.598,-24.189 6.686,-24.277 6.911,-24.277 6.999,-24.366 6.999,-24.543 6.911,-24.631 6.686,-24.631 6.598,-24.72 6.598,-24.897 6.686,-24.985 6.911,-24.985 6.999,-25.074 6.999,-25.251 6.911,-25.339 6.686,-25.339 6.598,-25.428 6.598,-25.605 6.686,-25.693 6.911,-25.693 6.999,-25.782 6.999,-25.959 6.911,-26.047 6.686,-26.047 6.598,-26.136 6.598,-26.54 6.598,-27.347 6.656,-27.406 6.685,-27.406 6.985,-27.706 pad.B31@6.985,-28.956 pad.B31@6.985,-29.456
  Bottom Layer w0.1: v1(2.738,-10.69) 2.775,-10.728 2.775,-10.877 2.858,-10.96 2.858,-11.781 2.967,-11.89 2.967,-11.977 v1(3.005,-12.016)
A13_N: pad.B12@0.61,-8 pad.B32 | length 27.1
  Top Layer w0.1: pad.B12@0.61,-8 0.61,-7.533 0.718,-7.425 0.743,-7.425 1.18,-6.988 v1(1.18,-6.86) ; v1(3.41,-12.016) 3.41,-12.636 8.373,-17.598 8.373,-27.347 8.314,-27.406 8.285,-27.406 7.985,-27.706 pad.B32@7.985,-29.456
  Bottom Layer w0.1: v1(1.18,-6.86) 1.18,-8.673 3.063,-10.556 3.063,-10.847 3.171,-10.955 3.171,-11.722 3.33,-11.881 3.41,-11.961 v1(3.41,-12.016)
A13_P: pad.B13@0.725,-8.925 pad.B33 | length 27.1
  Top Layer w0.1: pad.B13@0.725,-8.925 0.725,-9.507 0.9,-9.682 2.387,-9.682 v1(3.396,-10.69) ; v1(3.783,-12.016) 3.744,-12.054 3.744,-12.141 3.635,-12.25 3.635,-12.543 8.598,-17.505 8.598,-22.243 8.598,-24.092 8.686,-24.18 8.974,-24.18 9.063,-24.269 9.063,-24.446 8.974,-24.534 8.686,-24.534 8.598,-24.623 8.598,-24.8 8.686,-24.888 8.974,-24.888 9.063,-24.977 9.063,-25.154 8.974,-25.242 8.686,-25.242 8.598,-25.331 8.598,-25.508 8.686,-25.596 8.974,-25.596 9.063,-25.685 9.063,-25.862 8.974,-25.95 8.686,-25.95 8.598,-26.039 8.598,-26.443 8.598,-27.347 8.656,-27.406 8.685,-27.406 8.985,-27.706 pad.B33@8.985,-29.456
  Bottom Layer w0.1: v1(3.396,-10.69) 3.396,-11.542 3.744,-11.89 3.744,-11.977 v1(3.783,-12.016)
A14_N: pad.B15@0.84,-8 pad.B34 | length 27.4
  Top Layer w0.1: pad.B15@0.84,-8 0.84,-8.031 v1(1.556,-8.031) ; v1(3.294,-8.506) 3.297,-8.509 3.811,-8.509 10.372,-15.071 10.372,-25.476 10.372,-25.88 10.284,-25.969 10.197,-25.969 10.108,-26.057 10.108,-26.234 10.197,-26.323 10.284,-26.323 10.372,-26.411 10.372,-26.536 10.372,-27.347 10.314,-27.406 10.285,-27.406 9.985,-27.706 pad.B34@9.985,-29.456
  Bottom Layer w0.1: v1(1.556,-8.031) 1.565,-8.031 1.715,-8.181 2.969,-8.181 v1(3.294,-8.506)
A14_P: pad.B13@0.955,-8.925 pad.B35 | length 27.4
  Top Layer w0.1: pad.B13@0.95,-8.575 0.962,-8.575 1.032,-8.506 v1(1.556,-8.506) ; v1(2.765,-8.506) 3.09,-8.181 3.801,-8.181 4.005,-8.385 10.597,-14.977 10.597,-27.347 10.656,-27.406 10.685,-27.406 10.985,-27.706 pad.B35@10.985,-29.456
  Bottom Layer w0.1: v1(1.556,-8.506) 1.61,-8.506 1.71,-8.406 2.611,-8.406 2.711,-8.506 v1(2.765,-8.506)
"bottom 1": pad.B6@-2.4,-8 pad.B6@-20.015,-29.456 | length 31.7
  Top Layer w0.1: pad.B6@-20.015,-29.456 -20.015,-20.666 -7.349,-8 pad.B6@-2.4,-8
"bottom 2": pad.B7@-19.015,-29.456
gnd: Chv1.2 Chv2.1 Chv3.1 Cvdd1.2 Cvdd3.1 Cvss1.2 Cvss3.1 Cx1.1 pad.A5 pad.B5 | length 81.1
  Top Layer w0.15: -2.54,5.08 -2.54,5.842
  Top Layer w0.3: v3@-5.842,-5.9 -5.842,5.842 -2.54,5.842 5.901,5.842 5.901,-5.9 v3(-5.825,-5.9) v3@-5.842,-5.9
  Top Layer w0.5: pad.B5@-21.015,-29.456 v2(-21.015,-26.924) v2(-21.015,-26.035)
  Bottom Layer w0.15: v3(-5.825,-5.9) -5.825,-4.555 -4.767,-3.497 Cx1.1@-4.767,-2.732 ; Chv1.2@-5.275,5.272 -4.321,4.318 -3.048,4.318 v3(-2.54,4.826) -1.716,4.826 Cvss1.2@-1.589,4.953 ; Cvss1.2@-1.526,5.017 -0.7,4.191 1.462,4.191 2.351,5.08 Chv2.1@3.364,5.08 ; Cvdd3.1@12.399,14.986 Cvdd3.1@12.446,14.939
  Bottom Layer w0.5: pad.A5@-21.015,-29.456 v2(-21.015,-26.924) v2(-21.015,-26.035) ; Cvdd3.1@12.446,14.939 12.446,13.081 13.208,12.319 v2(18.241,12.319) ; Chv3.1@18.241,10.033 v2(18.241,12.319) ; Cvss3.1@18.241,14.986 v2(18.241,12.319)
H1_N: pad.A18 pad.B15@8,-1.925 | length 36.2
  Top Layer w0.1: pad.B15@8,-1.925 8.35,-1.925 8.371,-1.946 8.371,-2.125 8.275,-2.22 v1(8.275,-2.248)
  Bottom Layer w0.1: pad.A18@-6.015,-29.456 -6.015,-27.706 -5.715,-27.406 -5.686,-27.406 -5.628,-27.347 -5.628,-26.337 -5.628,-24.893 -5.628,-19.503 -2.391,-16.267 1.442,-16.267 8.383,-9.325 8.383,-2.406 8.275,-2.299 v1(8.275,-2.248)
H1_P: pad.A19 pad.B6@8.925,-1.81 | length 36.3
  Top Layer w0.1: v1(8.716,-2.248) 8.716,-2.194 8.621,-2.098 8.621,-1.81 pad.B6@8.925,-1.81
  Bottom Layer w0.1: pad.A19@-5.015,-29.456 -5.015,-27.706 -5.315,-27.406 -5.344,-27.406 -5.403,-27.347 -5.403,-23.429 -5.403,-19.596 -2.298,-16.491 1.535,-16.491 8.608,-9.419 8.608,-2.406 8.716,-2.299 v1(8.716,-2.248)
H2_N: pad.A20 pad.B7@8,-1.695 | length 44.3
  Top Layer w0.1: v1(7.325,-1.832) 7.339,-1.832 7.476,-1.695 pad.B7@8,-1.695
  Bottom Layer w0.1: pad.A20@-4.015,-29.456 -4.015,-27.706 -3.62,-27.311 -3.62,-27.225 -3.62,-26.883 -3.428,-26.691 -3.373,-26.691 -3.312,-26.631 -3.312,-26.397 -3.373,-26.337 -3.711,-26.337 -3.903,-26.145 -3.903,-25.725 -3.711,-25.533 -3.173,-25.533 -3.112,-25.473 -3.112,-25.239 -3.173,-25.179 -3.711,-25.179 -3.903,-24.987 -3.903,-24.567 -3.711,-24.375 -3.173,-24.375 -3.112,-24.315 -3.112,-24.081 -3.173,-24.021 -3.711,-24.021 -3.903,-23.829 -3.903,-23.409 -3.711,-23.217 -3.173,-23.217 -3.112,-23.157 -3.112,-22.923 -3.173,-22.863 -3.711,-22.863 -3.903,-22.671 -3.903,-22.251 -3.711,-22.059 -3.173,-22.059 -3.112,-21.999 -3.112,-21.765 -3.173,-21.705 -3.711,-21.705 -3.903,-21.513 -3.903,-21.093 -3.711,-20.901 -3.173,-20.901 -3.112,-20.841 -3.112,-20.607 -3.173,-20.547 -3.428,-20.547 -3.62,-20.355 -3.62,-20.146 -3.62,-20.078 -3.62,-18.517 -3.62,-18.226 -3.62,-18.132 -2.205,-16.717 1.628,-16.717 9.041,-9.304 9.041,-2.113 8.849,-1.921 7.468,-1.921 7.379,-1.832 v1(7.325,-1.832)
H2_P: pad.A21 pad.B8@8.925,-1.58 | length 44.3
  Top Layer w0.1: pad.B8@8.925,-1.58 9.41,-1.58 9.515,-1.685 9.515,-2.13 v1(9.397,-2.247)
  Bottom Layer w0.1: pad.A21@-3.015,-29.456 -3.015,-27.706 -3.395,-27.326 -3.395,-27.225 -3.395,-26.976 -3.335,-26.916 -3.279,-26.916 -3.087,-26.724 -3.087,-26.304 -3.279,-26.112 -3.618,-26.112 -3.678,-26.052 -3.678,-25.818 -3.618,-25.758 -3.079,-25.758 -2.887,-25.566 -2.887,-25.146 -3.079,-24.954 -3.618,-24.954 -3.678,-24.894 -3.678,-24.66 -3.618,-24.6 -3.079,-24.6 -2.887,-24.408 -2.887,-23.988 -3.079,-23.796 -3.618,-23.796 -3.678,-23.736 -3.678,-23.502 -3.618,-23.442 -3.079,-23.442 -2.887,-23.25 -2.887,-22.83 -3.079,-22.638 -3.618,-22.638 -3.678,-22.578 -3.678,-22.344 -3.618,-22.284 -3.079,-22.284 -2.887,-22.092 -2.887,-21.672 -3.079,-21.48 -3.618,-21.48 -3.678,-21.42 -3.678,-21.186 -3.618,-21.126 -3.079,-21.126 -2.887,-20.934 -2.887,-20.514 -3.079,-20.322 -3.335,-20.322 -3.395,-20.262 -3.395,-20.146 -3.395,-20.057 -3.395,-19.653 -3.335,-19.593 -3.034,-19.593 -2.974,-19.533 -2.974,-19.299 -3.034,-19.239 -3.335,-19.239 -3.395,-19.179 -3.395,-18.945 -3.335,-18.885 -3.034,-18.885 -2.974,-18.825 -2.974,-18.591 -3.034,-18.531 -3.335,-18.531 -3.395,-18.471 -3.395,-18.226 -2.111,-16.942 1.721,-16.942 9.266,-9.397 9.266,-2.406 9.397,-2.274 v1(9.397,-2.247)
H3_N: pad.A22 pad.B9@8,-1.465 | length 44.5
  Top Layer w0.1: v1(7.291,-1.368) 7.345,-1.368 7.443,-1.465 pad.B9@8,-1.465
  Bottom Layer w0.1: pad.A22@-2.015,-29.456 -2.015,-27.706 -1.715,-27.406 -1.686,-27.406 -1.628,-27.347 -1.628,-27.223 -1.628,-26.592 -1.436,-26.4 -1.216,-26.4 -1.156,-26.34 -1.156,-26.106 -1.216,-26.046 -1.719,-26.046 -1.911,-25.854 -1.911,-25.434 -1.719,-25.242 -1.18,-25.242 -1.12,-25.182 -1.12,-24.948 -1.18,-24.888 -1.719,-24.888 -1.911,-24.696 -1.911,-24.276 -1.719,-24.084 -1.18,-24.084 -1.12,-24.024 -1.12,-23.79 -1.18,-23.73 -1.719,-23.73 -1.911,-23.538 -1.911,-23.118 -1.719,-22.926 -1.18,-22.926 -1.12,-22.866 -1.12,-22.632 -1.18,-22.572 -1.719,-22.572 -1.911,-22.38 -1.911,-21.96 -1.719,-21.768 -1.18,-21.768 -1.12,-21.708 -1.12,-21.474 -1.18,-21.414 -1.719,-21.414 -1.911,-21.222 -1.911,-20.802 -1.719,-20.61 -1.18,-20.61 -1.12,-20.55 -1.12,-20.316 -1.18,-20.256 -1.436,-20.256 -1.628,-20.064 -1.628,-19.855 -1.628,-18.964 -1.628,-17.65 -1.144,-17.167 1.815,-17.167 9.722,-9.259 9.722,-2.112 9.532,-1.922 9.168,-1.922 8.942,-1.696 7.648,-1.696 7.32,-1.368 v1(7.291,-1.368)
H3_P: pad.A23 pad.B10@8.925,-1.35 | length 44.5
  Top Layer w0.1: pad.B10@8.925,-1.35 9.548,-1.35 9.808,-1.61 9.808,-1.736 v1(9.846,-1.774)
  Bottom Layer w0.1: pad.A23@-1.015,-29.456 -1.015,-27.706 -1.315,-27.406 -1.344,-27.406 -1.403,-27.347 -1.403,-27.223 -1.403,-26.685 -1.342,-26.625 -1.123,-26.625 -0.931,-26.433 -0.931,-26.013 -1.123,-25.821 -1.625,-25.821 -1.686,-25.761 -1.686,-25.527 -1.625,-25.467 -1.086,-25.467 -0.895,-25.275 -0.895,-24.855 -1.086,-24.663 -1.625,-24.663 -1.686,-24.603 -1.686,-24.369 -1.625,-24.309 -1.086,-24.309 -0.895,-24.117 -0.895,-23.697 -1.086,-23.505 -1.625,-23.505 -1.686,-23.445 -1.686,-23.211 -1.625,-23.151 -1.086,-23.151 -0.895,-22.959 -0.895,-22.539 -1.086,-22.347 -1.625,-22.347 -1.686,-22.287 -1.686,-22.053 -1.625,-21.993 -1.086,-21.993 -0.895,-21.801 -0.895,-21.381 -1.086,-21.189 -1.625,-21.189 -1.686,-21.129 -1.686,-20.895 -1.625,-20.835 -1.086,-20.835 -0.895,-20.643 -0.895,-20.223 -1.086,-20.031 -1.342,-20.031 -1.403,-19.971 -1.403,-19.855 -1.403,-19.655 -1.403,-19.251 -1.342,-19.19 -0.906,-19.19 -0.845,-19.13 -0.845,-18.897 -0.906,-18.836 -1.342,-18.836 -1.403,-18.776 -1.403,-18.543 -1.342,-18.482 -0.906,-18.482 -0.845,-18.422 -0.845,-18.189 -0.906,-18.128 -1.342,-18.128 -1.403,-18.068 -1.403,-17.743 -1.051,-17.392 1.908,-17.392 9.947,-9.352 9.947,-2.019 9.885,-1.957 9.885,-1.812 v1(9.846,-1.774)
H4_N: pad.A24 pad.B11@8,-1.235 | length 34.7
  Top Layer w0.1: pad.B11@8,-1.235 8.245,-1.235 v1(8.245,-1.048)
  Bottom Layer w0.1: pad.A24@-0.015,-29.456 -0.015,-27.706 0.375,-27.316 0.375,-19.243 10.172,-9.445 10.172,-1.64 9.981,-1.449 9.321,-1.449 9.299,-1.471 8.541,-1.471 8.351,-1.28 8.351,-1.206 8.245,-1.101 v1(8.245,-1.048)
H4_P: pad.A25 pad.B12@8.925,-1.12 | length 34.4
  Bottom Layer w0.1: pad.A25@0.985,-29.456 0.985,-27.706 0.6,-27.321 0.6,-19.336 10.397,-9.539 10.397,-1.547 10.074,-1.224 9.227,-1.224 9.206,-1.246 8.634,-1.246 8.576,-1.187 8.576,-1.092 8.676,-0.992 v1(8.676,-0.938)
H5_N: pad.A26 pad.B9@8,-0.11 | length 44.6
  Bottom Layer w0.1: pad.A26@1.985,-29.456 1.985,-27.706 2.285,-27.406 2.314,-27.406 2.372,-27.347 2.372,-27.237 2.372,-26.71 2.314,-26.651 2.129,-26.466 2.129,-26.032 2.314,-25.847 2.953,-25.847 3.006,-25.794 3.006,-25.546 2.953,-25.493 2.02,-25.493 1.835,-25.308 1.835,-24.874 2.02,-24.689 3.03,-24.689 3.083,-24.636 3.083,-24.388 3.03,-24.335 2.02,-24.335 1.835,-24.15 1.835,-23.716 2.02,-23.531 3.03,-23.531 3.083,-23.478 3.083,-23.23 3.03,-23.177 2.02,-23.177 1.835,-22.992 1.835,-22.558 2.02,-22.373 3.03,-22.373 3.083,-22.32 3.083,-22.072 3.03,-22.019 2.02,-22.019 1.835,-21.834 1.835,-21.4 2.02,-21.215 3.03,-21.215 3.083,-21.162 3.083,-20.914 3.03,-20.861 2.563,-20.861 2.372,-20.671 2.372,-20.462 2.372,-17.881 10.622,-9.632 10.622,-1.454 10.381,-1.213 10.161,-0.992 9.19,-0.992 8.811,-0.613 8.583,-0.613 v1(8.258,-0.288)
H5_P: pad.A27 pad.B10@8.925,0.005 | length 44.6
  Bottom Layer w0.1: pad.A27@2.985,-29.456 2.985,-27.706 2.685,-27.406 2.656,-27.406 2.597,-27.347 2.597,-27.237 2.597,-26.616 2.407,-26.426 2.354,-26.373 2.354,-26.125 2.407,-26.072 3.046,-26.072 3.231,-25.887 3.231,-25.453 3.046,-25.268 2.114,-25.268 2.06,-25.215 2.06,-24.967 2.114,-24.914 3.124,-24.914 3.308,-24.729 3.308,-24.295 3.124,-24.11 2.114,-24.11 2.06,-24.057 2.06,-23.809 2.114,-23.756 3.124,-23.756 3.308,-23.571 3.308,-23.137 3.124,-22.952 2.114,-22.952 2.06,-22.899 2.06,-22.651 2.114,-22.598 3.124,-22.598 3.308,-22.413 3.308,-21.979 3.124,-21.794 2.114,-21.794 2.06,-21.741 2.06,-21.493 2.114,-21.44 3.124,-21.44 3.308,-21.255 3.308,-20.821 3.124,-20.636 2.656,-20.636 2.597,-20.578 2.597,-20.462 2.597,-17.975 10.847,-9.725 10.847,-1.361 10.254,-0.767 9.283,-0.767 8.904,-0.388 8.807,-0.388 8.726,-0.307 8.726,-0.203 v1(8.688,-0.165)